# EAGLE board Power_Alert_v2 (EAGLE 9.6.2)
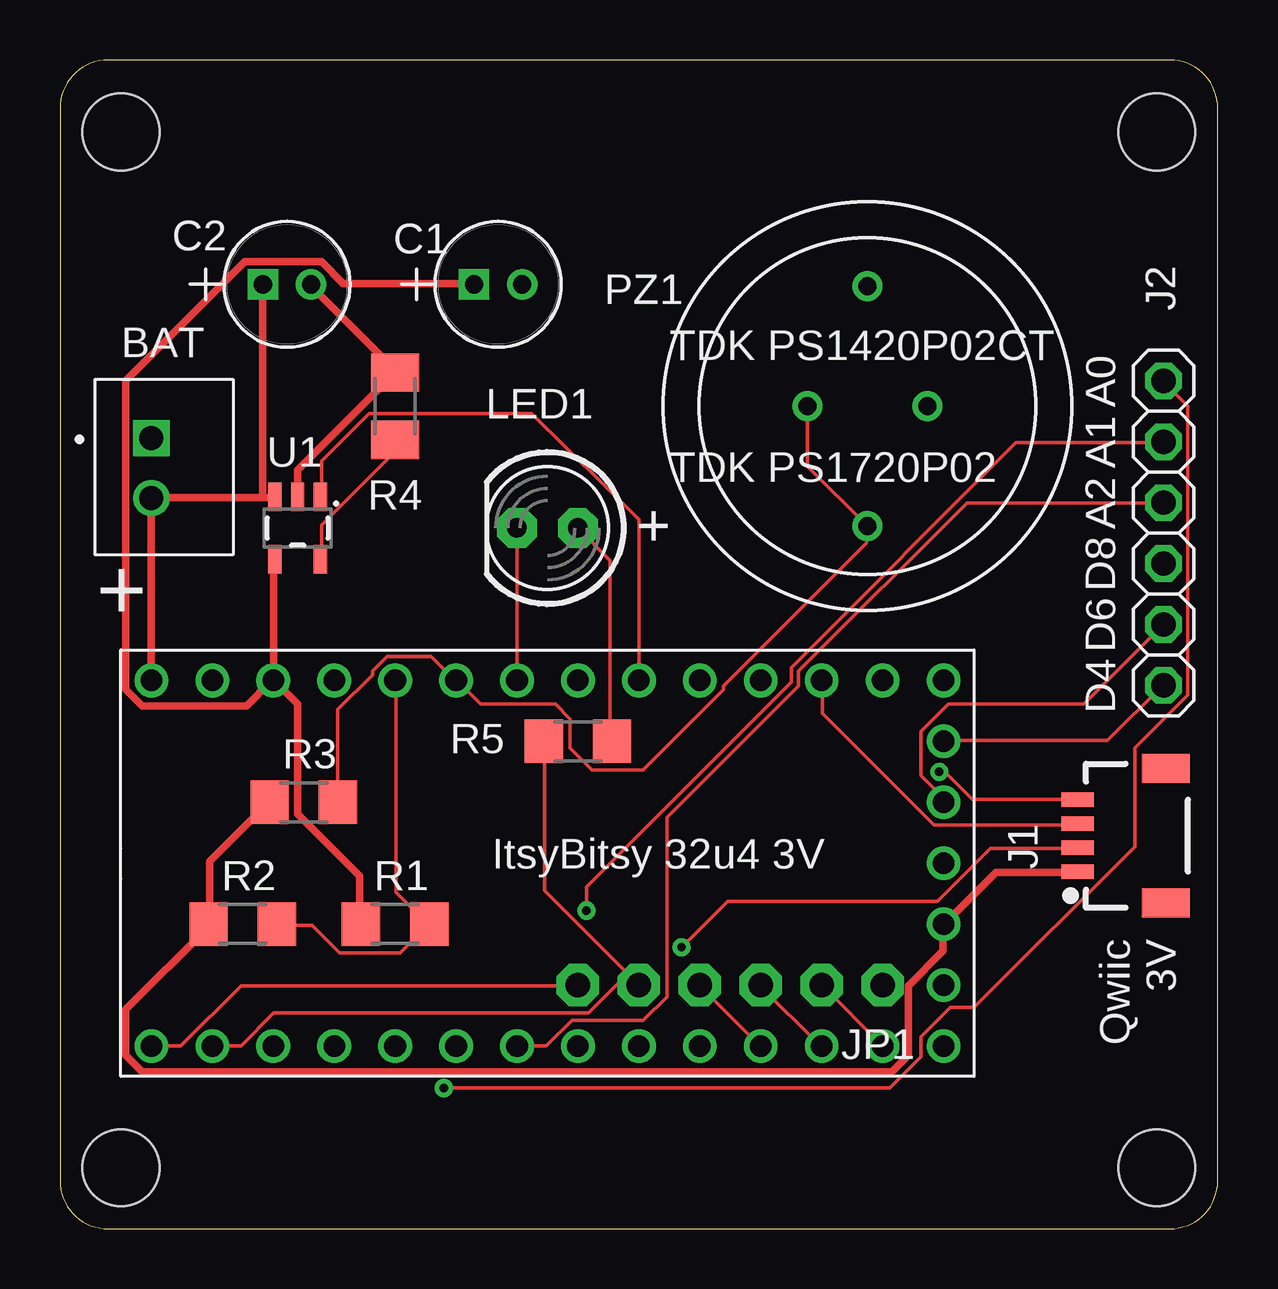
[diagram p0: board, top side]
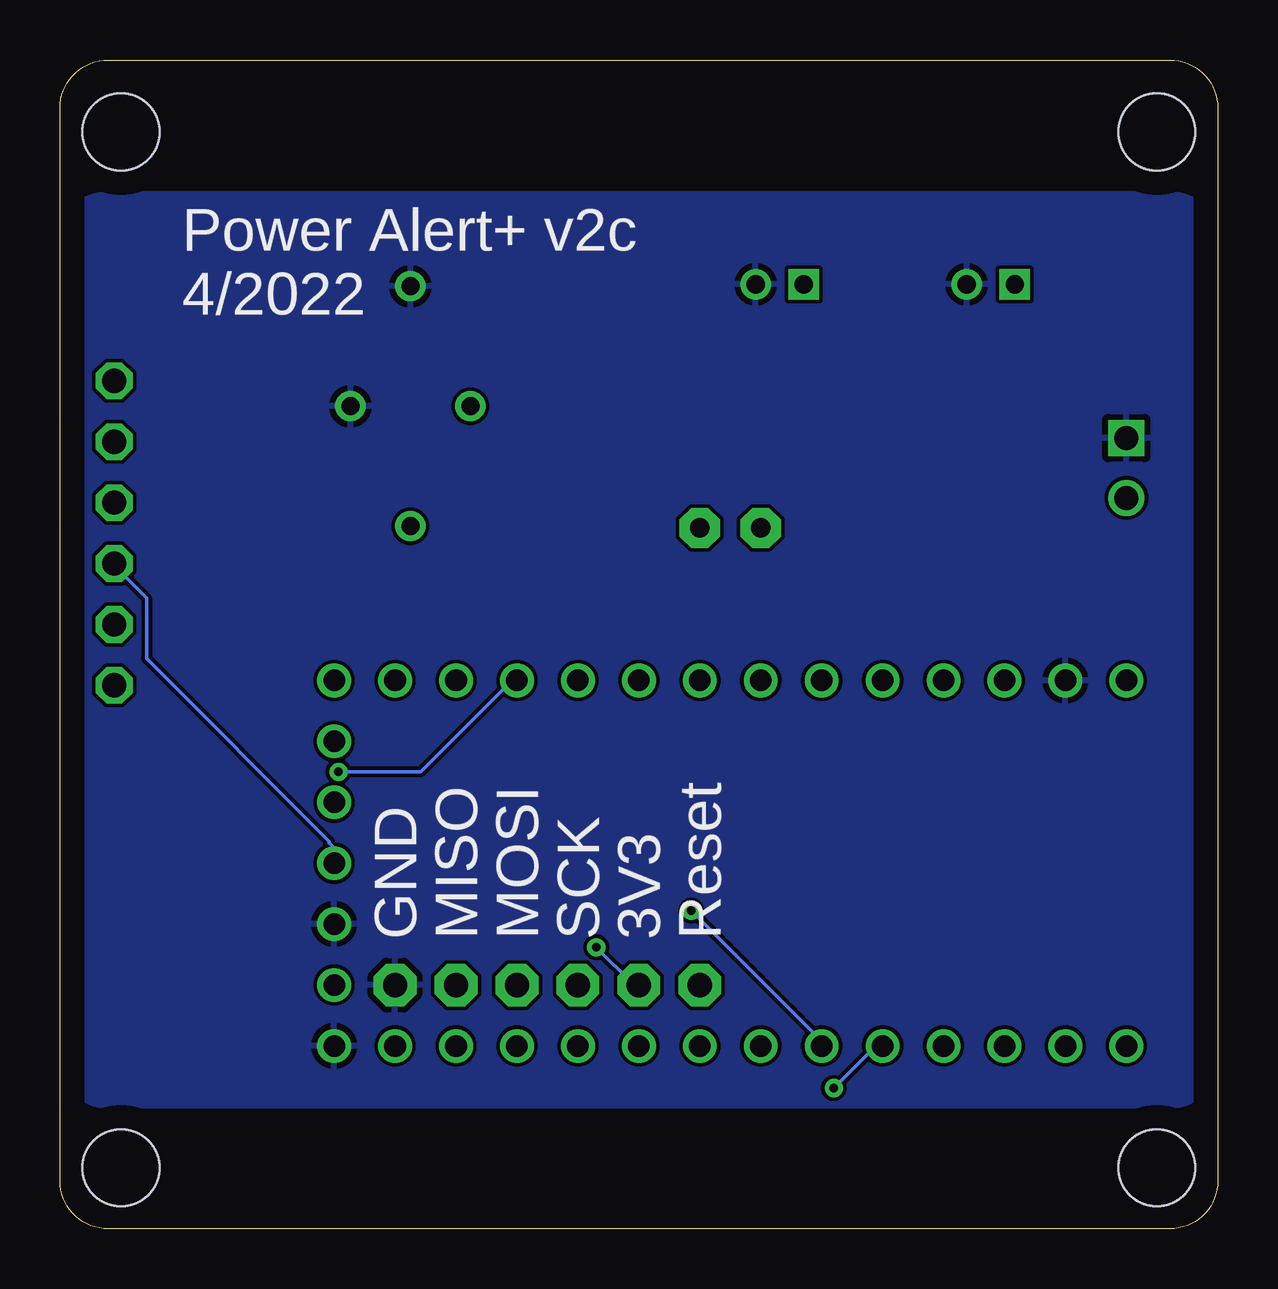
[diagram p1: board, bottom side, seen from below]

Size 48.26 x 48.72 mm. Coordinates in mm from the lower left corner, seen from the top.
Outline: 46.26,48.72 2,48.72 arc90 0,46.72 0,2 arc90 2,0 46.26,0 arc90 48.26,2 48.26,46.72 arc90 46.26,48.72
Copper layers (1*16): Top 0.035mm / dielectric 1.5mm / Bottom 0.035mm
Design rules "default": minimum track width 6mil, minimum drill 0.35mm, track to track 6mil, track to pad 6mil, pad to pad 6mil, via to via 6mil, smd to smd 6mil, copper to edge 40mil, drill to drill 6mil, minimum pad ring 10mil, minimum via ring 8mil, stop-mask expansion 4mil, vias tented up to drill 0mil, thermal gap 10mil
Net classes: 1 1A: width 0.305 mm
Holes 3.2 mm at 45.72,2.54 2.54,2.54 2.54,45.72 45.72,45.72
tKeepout: area 0,0 to 48.3,5.1; area 0,43.6 to 48.3,48.7

## Footprints (pad centres in the part's own frame; a part is rotated, then mirrored left to right if it is on the bottom)
B2B-XH-A(LF)(SN) = drill 1 square: 1 -1.21,0 | drill 1: 2 1.29,0
CAP-RADIAL-2X5 = drill 0.762 pad 1.27 square: 1 0,0 | drill 0.762 pad 1.27: 2 2.007,0
1X04_1MM_RA = smd 0.6 x 1.35: 1 -1.5,0; 2 -0.5,0; 3 0.5,0; 4 1.5,0 | smd 1.2 x 2: NC1 2.8,-3.675; NC2 -2.8,-3.675
1X06 = drill 1.016 octagon: 1 -6.35,0; 2 -3.81,0; 3 -1.27,0; 4 1.27,0; 5 3.81,0; 6 6.35,0
1X06-CLEANBIG = drill 1.016 pad 1.778 octagon: 1 -6.35,0; 2 -3.81,0; 3 -1.27,0; 4 1.27,0; 5 3.81,0; 6 6.35,0
LED5MM = drill 0.813 pad 1.676 octagon: A -1.27,0; K 1.27,0
TDK-PS1420P02CT = drill 0.75: P$1 -2.5,0; P$2 2.5,0
TDK-PS1720P02 = drill 0.75: P$1 -5,0; P$2 5,0
R1206 = smd 1.6 x 1.803: 1 -1.422,0; 2 1.422,0
M1206 = smd 1.6 x 2: 1 -1.4,0; 2 1.4,0
SOT23-5 = smd 0.55 x 1.2: 1 -0.95,-1.3; 2 0,-1.3; 3 0.95,-1.3; 4 0.95,1.3; 5 -0.95,1.3
ITSYBITYS-32U4 = drill 0.9: P$1 -6.35,-7.62; P$2 -3.81,-7.62; P$3 -1.27,-7.62; P$4 1.27,-7.62; P$5 3.81,-7.62; P$6 6.35,-7.62; P$7 8.89,-7.62; P$8 11.43,-7.62; P$9 13.97,-7.62; P$10 16.51,-7.62; P$11 19.05,-7.62; P$12 21.59,-7.62; P$13 24.13,-7.62; P$14 26.67,-7.62; P$15 26.67,-5.08; P$16 26.67,-2.54; P$17 26.67,0; P$18 26.67,2.54; P$19 26.67,5.08; P$20 26.67,7.62; P$21 24.13,7.62; P$22 21.59,7.62; P$23 19.05,7.62; P$24 16.51,7.62; P$25 13.97,7.62; P$26 11.43,7.62; P$27 8.89,7.62; P$28 6.35,7.62; P$29 3.81,7.62; P$30 1.27,7.62; P$31 -1.27,7.62; P$32 -3.81,7.62; P$33 -6.35,7.62

## Placement (x,y rotation side)
BAT  B2B-XH-A(LF)(SN)  [B2B-XH-A(LF)(SN)]  3.81,31.75 270 top
C1  47uF  [CAP-RADIAL-2X5]  17.26,39.37 0 top
C2  47uF  [CAP-RADIAL-2X5]  8.46,39.37 0 top
J1  [1X04_1MM_RA]  42.42,16.38 90 top
J2  [1X06]  46,29 90 top
JP1  [1X06-CLEANBIG]  27.94,10.16 180 top
LED1  [LED5MM]  20.32,29.21 180 top
PZ1  [TDK-PS1420P02CT]  33.66,34.29 0 top
PZ1B  [TDK-PS1720P02]  33.66,34.29 90 top
R1  2.7k  [R1206]  13.97,12.7 180 top
R2  2.7k  [R1206]  7.62,12.7 0 top
R3  1k  [R1206]  10.16,17.78 180 top
R4  2k  [M1206]  13.97,34.29 90 top
R5  65  [R1206]  21.59,20.32 180 top
U1  MCP73831  [SOT23-5]  9.91,29.21 180 top
U2  ItsyBitsy 32u4 3V  [ITSYBITYS-32U4]  10.16,15.24 0 top

## Library data of the parts
BAT = jst_fm_headers; CREATED_BY: PCBLayout.com; DIGIKEY_PARTNO: 455-2249-ND; MANUFACTURER: JST Sales America Inc.; MPN: B4B-XH-A(LF)(SN)
C1 C2 = generic
J1 = SparkFun-Connectors
J2 JP1 LED1 R1-R5 = adafruit
PZ1 PZ1B U2 = home
U1 = SparkFun-IC-Power; PROD_ID: IC-09995

## Nets
3V3: J1.2 JP1.5 R5.2 U2.P$2
!CHARGE_STATUS: U1.1 U2.P$25
A0: J2.6 U2.P$5
A1: J2.5 U2.P$6
A2: J2.4 U2.P$7
ALERT: PZ1.P$1 PZ1B.P$1 R3.1 U2.P$28
BAT [1A]: BAT.2 C2.1 U1.3 U2.P$33
D4: J2.1 U2.P$19
D6: J2.2 U2.P$18
D8: J2.3 U2.P$17
GND [1A]: BAT.1 C1.2 C2.2 J1.1 JP1.1 PZ1.P$2 PZ1B.P$2 R2.1 R3.2 R4.2 U1.2 U2.P$14 U2.P$16 U2.P$32
LED_EXT: LED1.K U2.P$27
MISO: JP1.2 U2.P$13
MOSI: JP1.3 U2.P$12
N$3: LED1.A R5.1
PROG: R4.1 U1.5
RST: JP1.6 U2.P$1
SCK: JP1.4 U2.P$11
SCL: J1.4 U2.P$23
SDA: J1.3 U2.P$22
SENSE: R1.1 R2.2 U2.P$29
USB [1A]: C1.1 R1.2 U1.4 U2.P$31
VHI: U2.P$4

## Tracks (layer width: path | path; a pad name or v marks a point on that pad's centre or on a via)
3V3  (via drill 0.35)
  Top 0.152: v25.91,11.73 27.81,13.64 36.58,13.64 38.79,15.85 42.37,15.85 J1.2 | R5.2 20.19,20.27 20.19,14.1 JP1.5 23.62,10.59 22.02,8.99 8.91,8.99 7.54,7.62 U2.P$2
  Bottom 0.152: v25.91,11.73 24.38,10.21 24.16,10.21 JP1.5
!CHARGE_STATUS
  Top 0.152: U2.P$25 24.13,29.57 19.66,33.98 12.88,33.98 10.9,32 10.9,30.56 U1.1
A0  (via drill 0.35)
  Top 0.152: v16,5.87 34.59,5.87 35.89,7.16 35.89,8 37.11,9.22 38.1,9.22 44.81,15.93 44.81,20.04 47.02,22.25 47.02,34.29 46.02,35.28 J2.6
  Bottom 0.152: U2.P$5 14.25,7.62 v16,5.87
A1  (via drill 0.35)
  Top 0.152: v21.95,13.26 21.95,14.25 30.48,22.78 30.48,23.39 39.85,32.77 45.95,32.77 J2.5
  Bottom 0.152: v21.95,13.26 16.54,7.85 16.54,7.62 U2.P$6
A2
  Top 0.152: U2.P$7 20.27,7.62 21.34,8.69 24.31,8.69 25.3,9.68 25.3,17.14 30.79,22.63 30.79,23.24 37.8,30.25 45.95,30.25 J2.4
ALERT
  Top 0.152: PZ1.P$1 31.17,31.77 33.6,29.34 PZ1B.P$1 33.6,29.26 33.6,28.57 27.66,22.63 27.66,22.48 24.31,19.13 22.17,19.13 21.26,20.04 21.26,21.26 20.65,21.87 17.53,21.87 16.54,22.86 U2.P$28 16.46,22.86 15.47,23.85 13.64,23.85 13.03,23.24 13.03,23.09 11.58,21.64 11.58,17.83 R3.1
BAT
  Top 0.305: 8.46,30.48 3.81,30.48 BAT.2 U2.P$33 | 8.46,30.48 8.91,30.48 U1.3 | 8.46,30.48 8.46,39.32 C2.1
D4
  Top 0.152: U2.P$19 36.88,20.34 43.66,20.34 45.95,22.63 J2.1
D6
  Top 0.152: U2.P$18 36.8,17.83 36.8,17.98 35.89,18.9 35.89,20.73 37.03,21.87 42.67,21.87 45.95,25.15 J2.2
D8
  Bottom 0.152: U2.P$17 36.88,15.24 36.88,15.93 37.03,16.08 37.03,16.15 44.65,23.77 44.65,26.29 46.02,27.66 J2.3
GND
  Top 0.305: U1.2 9.91,31.62 13.95,35.66 R4.2 13.95,35.81 10.44,39.32 C2.2 | J1.1 42.37,14.86 39.01,14.86 36.88,12.72 U2.P$16 36.8,12.57 36.8,11.58 35.36,10.13 35.36,7.24 34.67,6.55 3.43,6.55 2.74,7.24 2.74,9.14 6.17,12.57 R2.1 6.25,12.72 6.25,15.32 8.69,17.75 R3.2
  pour Bottom: 46.26,5.08 2,5.08 arc-90 0,7.08 0,41.18 arc-90 2,43.18 46.26,43.18 arc-90 48.26,41.18 48.26,7.08 arc-90
LED_EXT
  Top 0.152: U2.P$27 LED1.K
MISO
  Top 0.152: JP1.2 U2.P$13
MOSI
  Top 0.152: U2.P$12 31.7,7.62 29.18,10.13 JP1.3
N$3
  Top 0.152: R5.1 22.94,20.4 22.94,27.86 LED1.A
PROG
  Top 0.152: U1.5 10.9,27.96 10.9,29.34 13.95,32.38 13.95,32.84 R4.1
RST
  Top 0.152: U2.P$1 5.03,7.62 7.54,10.13 21.57,10.13 JP1.6
SCK
  Top 0.152: U2.P$11 29.18,7.62 26.67,10.13 JP1.4
SCL  (via drill 0.35)
  Top 0.152: v36.65,19.05 36.88,19.05 38.02,17.91 42.37,17.91 J1.4
  Bottom 0.152: v36.65,19.05 33.22,19.05 29.72,22.55 29.57,22.55 29.26,22.86 U2.P$23
SDA
  Top 0.152: J1.3 42.37,16.84 36.42,16.84 31.77,21.49 31.77,22.86 U2.P$22
SENSE
  Top 0.152: R2.2 9.07,12.65 10.52,12.65 11.66,11.51 14.17,11.51 15.32,12.65 R1.1 15.32,12.72 14.02,14.02 14.02,22.86 U2.P$29
USB
  Top 0.305: U1.4 8.91,27.89 8.91,22.86 U2.P$31 | R1.2 12.5,12.72 12.5,14.71 9.91,17.3 9.91,21.87 8.99,22.78 U2.P$31 | C1.1 17.22,39.4 11.81,39.4 10.9,40.31 7.7,40.31 2.74,35.36 2.74,22.48 3.43,21.79 7.77,21.79 8.76,22.78 U2.P$31

## Text on the board
tPlace: TDK PS1420P02CT | A0 | A1 | TDK PS1720P02 | A2 | + | D8 | + | D6 | D4 | ItsyBitsy 32u4 3V | Qwiic / 3V
bPlace: Power Alert+ v2c / 4/2022 | Reset | 3V3 | SCK | MOSI | MISO | GND